# Altium PCB Template2.PcbDoc (part 2 of 2)
Units mm, origin at the board's own origin, x right, y up, seen from the top; angles counter-clockwise.
Board outline 69.9 x 70 mm, 4 copper layers (Top Layer, InternalPlane1, InternalPlane2, Bottom Layer), stack 1.963 mm thick; 136 components, 102 nets, 457 pads, 402 vias.
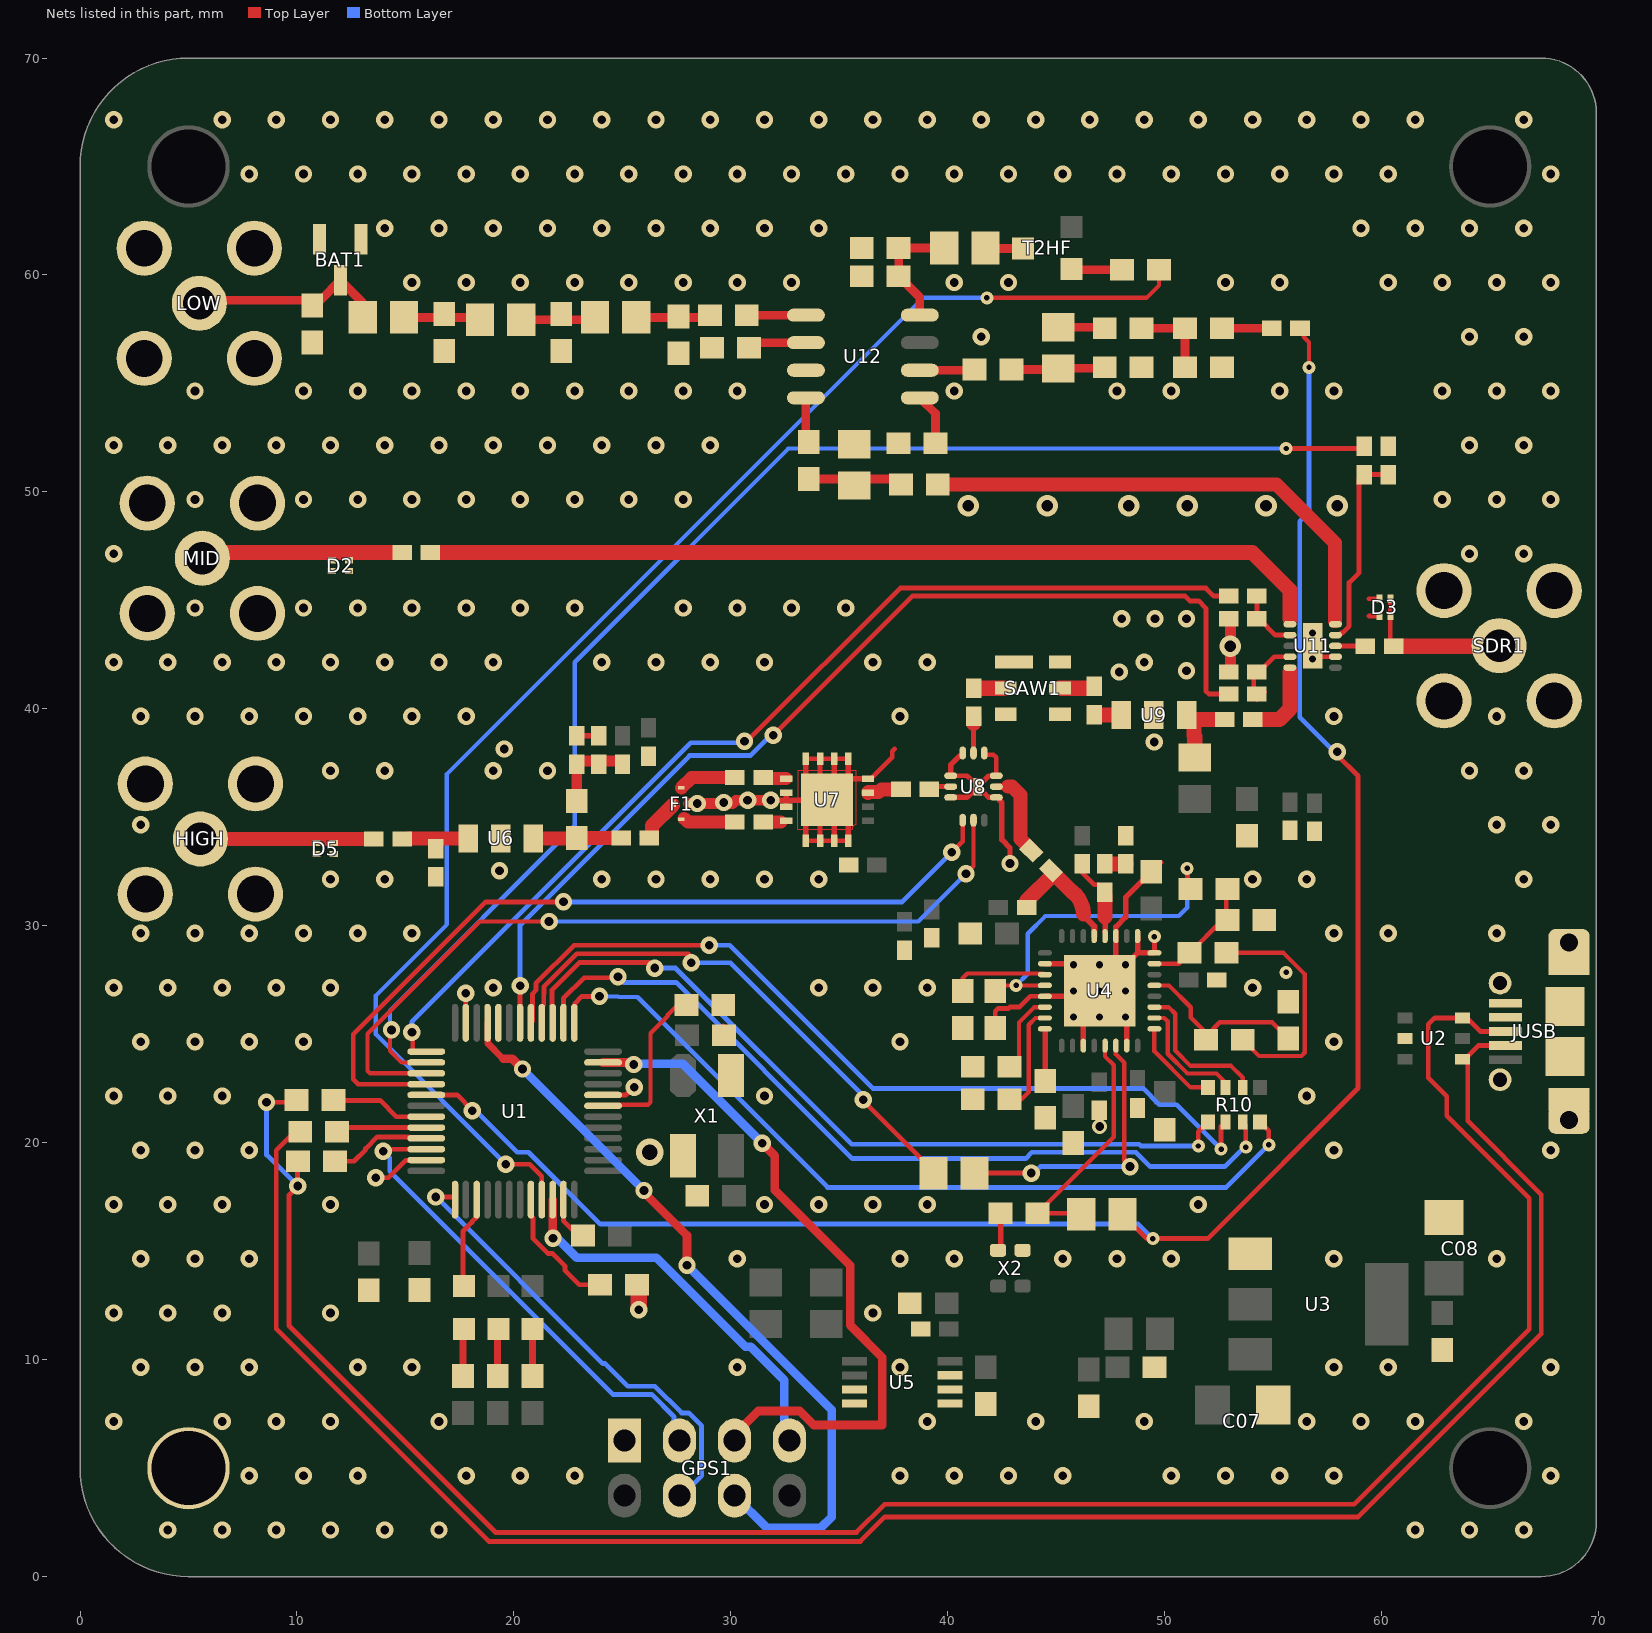
[diagram p4: the nets of this part, all layers, seen from the top]

## Via types
v1: diameter 0.8, hole 0.4, Top Layer to Bottom Layer, 348 vias
v2: diameter 0.6, hole 0.25, Top Layer to Bottom Layer, 22 vias
v3: diameter 1.27, hole 0.711, Top Layer to Bottom Layer, 13 vias
v4: diameter 0.66, hole 0.33, Top Layer to Bottom Layer, tented top, 11 vias
v5: diameter 1, hole 0.54, Top Layer to Bottom Layer, 7 vias
v6: diameter 0.7, hole 0.4, Top Layer to Bottom Layer, 1 vias

## Nets (pads, with @x,y where several pads share a name; then routed paths per layer and width w, separated by ;. In a path a pad name is that pad's centre, name@x,y a point inside that pad or via, vN(x,y) a via of type N, cw(c..) or ccw(c..) an arc to the next point about the centre after c; other vN are vias at no path point) (continued)
CPU_TX: GPS1.6 U1.21 | length 35.5
  Top Layer w0.3: U1.21@18.786,25.525 18.786,24.593 19.504,23.875
  Top Layer w0.4: 19.504,23.875 19.925,23.875 v1(20.4,23.4) ; v1(26,17.8) 26,17.7 27.98,15.72 v1(27.98,14.35) ; GPS1.6@30.17,3.73 GPS1.6@30.17,4.288
  Bottom Layer w0.4: v1(20.4,23.4) v1(26,17.8) ; v1(27.98,14.35) 34.65,7.68 34.65,2.75 34.15,2.25 31.65,2.25 GPS1.6@30.17,3.73
CPU_USB_LED: U1.39 USB.2 | length 3.9
  Top Layer w0.22: USB.2@17.654,13.687 17.654,15.915 18.066,16.327 18.066,16.348 18.271,16.553 18.271,17.36 U1.39@18.286,17.375
CS_PLL: R10.5 U1.14 | length 38.5
  Top Layer w0.22: U1.14@22.286,25.525 22.286,26.65 23.236,27.6 24.65,27.6 v1@24.8,27.75 ; R10.5@53.6,20.95 53.736,20.814 v2(53.736,19.8)
  Bottom Layer w0.22: v1(24.8,27.65) 25.06,27.39 27.48,27.39 35.6,19.27 43.587,19.27 43.877,19.56 48.673,19.56 49.333,18.9 52.764,18.9 53.664,19.8 v2(53.736,19.8)
CS_U1: R10.6 U4.3 | length 6.9
  Top Layer w0.2: U4.3@49.525,26.25 50.178,26.25 50.486,25.942 50.486,24.247 51.191,23.542 53.058,23.542 53.6,23 R10.6@53.6,22.55
GND: BAT1.1 BAT1.2 C01.1 C02.1 C03.1 C04.1 C05.1 C06.1 C07.2 C08.2 C09.1 C10.1 C11.1 C12.1 C13.1 C14.1 C15.1 C16.1 C17.1 C18.1 C19.1 C20.1 C21.1 C22.1 C23.1 C25.1 C28.1 C29.1 C32.1 C33.2 C34.1 C38.1 C39.1 C40.1 C41.1 C45.2 C46.2 C47.1 C54.1 C55.1 C56.1 C57.1 C58.1 C59.1 C60.1 C62.2 C64.1 D2.1 D2.2 D3.1 D3.2 D5.1 D5.2 F1.4 GPS1.1 H2.0 HIGH.2 HIGH.3 HIGH.4 HIGH.5 JUSB.4 JUSB.5 JUSB.6 L9.1 LOW.2 LOW.3 LOW.4 LOW.5 MID.2 MID.3 MID.4 MID.5 R01.1 R08.1 R14.1 R17.1 R24.1 R26.1 R27.2 R28.2 SAW1.1 SAW1.3 SAW1.4 SAW1.6 SDR1.2 SDR1.3 SDR1.4 SDR1.5 U1.8 U1.20 U1.23 U1.35 U1.47 U2.2 U3.1 U4.8 U4.9 U4.11 U4.18 U4.21 U4.27 U4.31 U4.33 U5.3 U5.4 U5.5 U5.6 U5.7 U6.2 U7.4 U7.5 U7.6 U7.7 U7.8 U7.10 U7.11 U7.13 U7.14 U7.15 U7.16 U7.17 U8.1 U8.3 U8.4 U8.6 U8.10 U8.12 U8.13 U9.2 U11.7 U11.11 U12.3 X1.2 X1.4 X2.2 | length 84.1
  Top Layer w0.22: v1(13.639,18.39) 14.219,18.39 15.014,19.185 15.946,19.185 U1.35@15.961,19.2 ; U1.23@17.786,25.525 v1(17.786,26.886) ; U1.47@22.286,17.375 22.286,16.409 22.975,15.72 C02.1@23.183,15.72 ; U1.8@24.111,22.2 25.15,22.203 v1(25.55,22.55) ; C05.1@29.65,25.39 30.04,25 30.08,25 C05.1@29.861,25.219 ; C06.1@29.861,26.139 C06.1@29.65,26.35 29.69,26.35 C06.1@30.08,25.96 ; v1(31.836,35.783) v1@32.192,35.783 ; U7.13@33.461,33.919 U7.13@33.461,33.919 U7.14@34.111,33.919 34.761,33.92 U7.15@34.762,33.921 ; U7.8@33.461,37.696 33.462,37.695 34.111,37.695 34.761,37.695 35.41,37.695 U7.5@35.411,37.694 ; U7.15@34.762,33.921 U7.16@35.41,33.921 ; U7.4@36.323,36.783 36.46,36.783 37.439,37.762 37.439,38.039 37.55,38.15 ; U8.4@40.136,36.915 40.886,36.915 41.096,36.705 41.296,36.705 41.386,36.615 U8.13@41.386,36.415 41.386,36.215 41.476,36.125 41.676,36.125 41.871,35.93 U8.10@41.963,35.93 ; U8.1@41.686,37.965 41.686,37.925 41.723,37.888 42.107,37.888 42.236,37.759 U8.12@42.236,36.915 ; C25.1@42.186,25.292 42.186,26.053 42.315,26.182 42.794,26.182 42.87,26.258 43.32,26.258 43.811,26.75 U4.21@44.475,26.75 ; U8.10@42.226,35.924 U8.10@42.236,35.915 ; C19.1@46.986,21.492 46.986,20.784 ccw(c47.034,20.784) v6(47,20.75) ; U4.9@48.75,29.525 U4.9@48.763,29.513 ; v2@49.513,29.513 v2(49.525,29.5) U4.8@49.525,28.75 ; C54.1@52.95,41.7 C54.1@53.025,41.775 ; C55.1@52.95,44.15 C55.1@53.025,44.075 ; U11.11@56.819,42.9 56.819,42.74 57.159,42.4 U11.7@57.869,42.4 ; 59.4,44.279 D3.2@59.9,44.279 ; 59.4,45.079 D3.1@59.9,45.079 ; JUSB.6@68.638,29.218 68.36,29.218 JUSB.6@68.708,29.566
  Top Layer w0.25: C33.2@22.9,38.75 C34.1@23.909,38.75 ; v1@32.192,35.783 32.549,35.783 ; U7.11@32.549,35.481 32.549,35.783 ; U7.10@32.549,36.133 32.549,35.783 ; U7.13@33.461,33.919 33.461,34.458 33.461,34.833 U7.17@34.111,35.483 ; U7.8@33.461,37.696 33.461,37.158 33.461,36.783 U7.17@34.111,36.133 ; U7.14@34.111,33.919 34.111,34.458 U7.17@34.111,35.483 ; U7.7@34.111,37.695 34.111,37.158 U7.17@34.111,36.133 ; U7.6@34.761,37.695 34.761,37.158 U7.17@34.761,36.133 ; U7.15@34.762,33.921 34.762,34.458 U7.17@34.762,35.482 ; U7.16@35.411,33.92 35.411,34.458 35.411,34.833 U7.17@34.762,35.482 ; U7.5@35.411,37.694 35.411,37.158 U7.17@35.411,36.783 ; U7.4@36.323,36.783 35.786,36.783 U7.17@35.411,36.783 ; U8.6@40.136,35.915 40.886,35.915 U8.13@41.324,36.352 ; U8.4@40.136,36.915 40.136,37.415 40.526,37.805 40.663,37.805 40.686,37.828 U8.3@40.686,37.965 ; U8.13@41.386,36.615 41.461,36.69 41.661,36.69 41.876,36.905 42.226,36.905 U8.12@42.236,36.915 ; 41.876,35.924 42.226,35.924 42.363,35.924 42.396,35.892 42.396,35.784 42.436,35.743 42.436,35.73 42.491,35.675 42.491,33.968 42.87,33.589 v1(42.87,32.87) ; U4.21@44.475,26.75 U4.33@46.75,26.75 ; U4.18@44.475,28.25 45.75,28.25 v4(45.8,28.2) v4(47,27) ; U4.27@46.25,24.475 46.25,26.25 U4.33@46.75,26.75 ; U4.31@48.25,24.475 48.25,25.75 v4(48.2,25.8) v4(47,27) ; U4.9@48.75,29.525 48.75,28.75 ; U4.8@49.525,28.75 48.75,28.75 ; C15.1@49.811,32.917 49.761,32.917 49.386,32.542 C15.1@49.386,32.492 49.386,32.442 49.011,32.067 48.961,32.067 48.2,31.306 48.2,30.4 47.75,29.95 U4.11@47.75,29.525 U4.33@47.75,27.75 ; 32.549,35.783 33.086,35.783 U7.17@34.411,35.783 ; U7.17@34.111,35.483 U7.17@34.411,35.783 ; U7.17@34.111,36.133 U7.17@34.436,35.808 ; U7.17@34.411,35.783 U7.17@34.436,35.808 ; U7.17@34.436,35.808 U7.17@34.761,36.133 ; U7.17@34.436,35.808 U7.17@34.762,35.482 ; U7.17@34.761,36.133 U7.17@35.411,36.783 ; U4.33@46.75,26.75 v4(47,27) ; v4(47,27) U4.33@47.75,27.75 ; U4.33@47.75,27.75 48.75,28.75
  Top Layer w0.5: F1.4@28.047,35.633 29.623,35.633 v1(29.668,35.679) ; v1@29.668,35.633 30.074,35.633 30.224,35.783 31.697,35.783 v1@31.738,35.742 ; C54.1@53.025,41.775 v5(53.025,42.885) C55.1@53.025,44.075
  Top Layer w0.75: v1(25.75,12.3) R01.1@25.75,13.4
  other v1: 4.05,2.15 6.55,2.15 9.05,2.15 11.55,2.15 14.05,2.15 16.55,2.15 61.55,2.15 64.05,2.15 66.55,2.15 7.8,4.65 10.3,4.65 12.8,4.65 17.8,4.65 20.3,4.65 22.8,4.65 37.8,4.65 40.3,4.65 42.8,4.65 45.3,4.65 50.3,4.65 52.8,4.65 55.3,4.65 57.8,4.65 67.8,4.65 1.55,7.15 6.55,7.15 9.05,7.15 11.55,7.15 16.55,7.15 39.05,7.15 44.05,7.15 49.05,7.15 56.55,7.15 59.05,7.15 61.55,7.15 66.55,7.15 2.8,9.65 5.3,9.65 7.8,9.65 12.8,9.65 15.3,9.65 30.3,9.65 37.8,9.65 57.8,9.65 60.3,9.65 67.8,9.65 1.55,12.15 4.05,12.15 6.55,12.15 11.55,12.15 36.55,12.15 2.8,14.65 5.3,14.65 7.8,14.65 30.3,14.65 37.8,14.65 40.3,14.65 45.3,14.65 47.8,14.65 50.3,14.65 57.8,14.65 65.3,14.65 1.55,17.15 4.05,17.15 6.55,17.15 11.55,17.15 31.55,17.15 34.05,17.15 36.55,17.15 39.05,17.15 51.55,17.15 2.8,19.65 5.3,19.65 7.8,19.65 57.8,19.65 67.8,19.65 1.55,22.15 4.05,22.15 6.55,22.15 31.55,22.15 56.55,22.15 2.8,24.65 5.3,24.65 7.8,24.65 10.3,24.65 37.8,24.65 57.8,24.65 1.55,27.15 4.05,27.15 6.55,27.15 9.05,27.15 11.55,27.15 19.05,27.15 34.05,27.15 36.55,27.15 39.05,27.15 54.05,27.15 2.8,29.65 5.3,29.65 7.8,29.65 10.3,29.65 12.8,29.65 15.3,29.65 57.8,29.65 60.3,29.65 65.3,29.65 11.55,32.15 14.05,32.15 24.05,32.15 26.55,32.15 29.05,32.15 31.55,32.15 34.05,32.15 54.05,32.15 56.55,32.15 66.55,32.15 19.337,32.539 2.8,34.65 65.3,34.65 67.8,34.65 28.45,35.633 30.772,35.783 11.55,37.15 14.05,37.15 19.05,37.15 21.55,37.15 64.05,37.15 66.55,37.15 19.55,38.15 49.516,38.47 2.8,39.65 5.3,39.65 7.8,39.65 10.3,39.65 12.8,39.65 15.3,39.65 17.8,39.65 37.8,39.65 57.8,39.65 65.3,39.65 47.905,41.7 51.005,41.75 1.55,42.15 4.05,42.15 6.55,42.15 9.05,42.15 11.55,42.15 14.05,42.15 16.55,42.15 19.05,42.15 24.05,42.15 26.55,42.15 29.05,42.15 31.55,42.15 36.55,42.15 39.05,42.15 49.05,42.15 48.019,44.15 49.55,44.15 51.005,44.15 5.3,44.65 10.3,44.65 12.8,44.65 15.3,44.65 17.8,44.65 20.3,44.65 22.8,44.65 27.8,44.65 30.3,44.65 32.8,44.65 35.3,44.65 1.55,47.15 64.05,47.15 66.55,47.15 5.3,49.65 10.3,49.65 12.8,49.65 15.3,49.65 17.8,49.65 20.3,49.65 22.8,49.65 25.3,49.65 27.8,49.65 62.8,49.65 65.3,49.65 67.8,49.65 1.55,52.15 4.05,52.15 6.55,52.15 9.05,52.15 11.55,52.15 14.05,52.15 16.55,52.15 19.05,52.15 21.55,52.15 24.05,52.15 26.55,52.15 29.05,52.15 64.05,52.15 66.55,52.15 5.3,54.65 10.3,54.65 12.8,54.65 15.3,54.65 17.8,54.65 20.3,54.65 22.8,54.65 25.3,54.65 27.8,54.65 30.3,54.65 40.3,54.65 47.8,54.65 50.3,54.65 55.3,54.65 57.8,54.65 62.8,54.65 65.3,54.65 67.8,54.65 41.55,57.15 64.05,57.15 66.55,57.15 15.3,59.65 17.8,59.65 20.3,59.65 22.8,59.65 25.3,59.65 27.8,59.65 30.3,59.65 32.8,59.65 40.3,59.65 42.8,59.65 52.8,59.65 55.3,59.65 60.3,59.65 62.8,59.65 65.3,59.65 67.8,59.65 14.05,62.15 16.55,62.15 19.05,62.15 21.55,62.15 24.05,62.15 26.55,62.15 29.05,62.15 31.55,62.15 34.05,62.15 59.05,62.15 61.55,62.15 64.05,62.15 66.55,62.15 7.8,64.65 10.3,64.65 12.8,64.65 15.3,64.65 17.8,64.65 20.3,64.65 22.8,64.65 25.3,64.65 27.8,64.65 30.3,64.65 32.8,64.65 35.3,64.65 37.8,64.65 40.3,64.65 42.8,64.65 45.3,64.65 47.8,64.65 50.3,64.65 52.8,64.65 55.3,64.65 57.8,64.65 60.3,64.65 67.8,64.65 1.55,67.15 6.55,67.15 9.05,67.15 11.55,67.15 14.05,67.15 16.55,67.15 19.05,67.15 21.55,67.15 24.05,67.15 26.55,67.15 29.05,67.15 31.55,67.15 34.05,67.15 36.55,67.15 39.05,67.15 41.55,67.15 44.05,67.15 46.55,67.15 49.05,67.15 51.55,67.15 54.05,67.15 56.55,67.15 59.05,67.15 61.55,67.15 66.55,67.15
  other v2: 55.6,27.85
  other v3: 26.254,19.554
  other v4: 45.8,25.8 47,25.8 45.8,27 48.2,27 47,28.2 48.2,28.2 56.819,42.3 56.819,43.5
  other v5: 40.95,49.364 44.583,49.364 48.345,49.364 51.036,49.364 54.669,49.364 57.955,49.364
GPS_RST: GPS1.7 U1.46 | length 18.3
  Top Layer w0.4: U1.46@21.786,17.375 21.786,15.9 22,15.686 21.914,15.6 v1(21.8,15.6)
  Bottom Layer w0.4: v1(21.8,15.6) 22,15.6 22.9,14.7 26.569,14.7 30.678,10.591 30.916,10.591 32.458,9.05 32.458,6.776 32.71,6.524 GPS1.7@32.71,6.27
IMG_F_HIGH: C36.1 F1.3 | length 2.4
  Top Layer w0.6: F1.3@27.85,34.95 28.017,34.783 C36.1@30.186,34.783
IMG_F_LOW: C37.1 F1.1 | length 2.7
  Top Layer w0.6: F1.1@27.722,36.358 28.191,36.828 C37.1@30.186,36.828
LO+: C26.2 U8.11 | length 4
  Top Layer w0.3: U8.11@42.236,36.415 42.786,36.415
  Top Layer w0.65: 42.786,36.415 42.969,36.415 43.35,36.034 43.35,33.992 43.84,33.502 C26.2@43.84,33.467
LO-: C27.2 R14.2 | length 1
  Top Layer w0.7: C27.2@47.236,32.85 R14.2@48.2,32.85
MCO: C67.2 R11.2 U1.29 | length 86.9
  Top Layer w0.2: 56.436,57.186 56.4,57.15 56.65,56.9 v2(56.65,55.742)
  Top Layer w0.22: U1.29@15.961,22.2 17.379,22.2 18.083,21.496 v1(18.083,21.473) ; R11.2@48.05,16.7 49.171,15.579 v2(49.45,15.579) 51.979,15.579 58.91,22.51 58.91,36.908 57.955,37.863 v1(57.955,38.015)
  Bottom Layer w0.22: v1@17.9,21.29 v1(18.083,21.473) 18.24,21.473 20.152,19.56 20.673,19.56 23.983,16.25 48.779,16.25 v2(49.45,15.579) ; v2(56.65,55.742) 56.65,49.058 56.229,48.637 56.229,39.61 57.824,38.015 v1(57.955,38.015)
MIX_EN: U1.28 U8.7 | length 38.3
  Top Layer w0.22: U1.28@15.961,22.7 12.819,22.7 12.6,22.919 12.6,25 18.7,31.1 v1(22.286,31.1) ; v1(40.186,33.386) 40.686,33.886 U8.7@40.686,34.865
  Bottom Layer w0.22: v1(22.286,31.1) 37.9,31.1 v1(40.186,33.386)
MIX_X2: U1.27 U8.8 | length 37.7
  Top Layer w0.2: U1.27@15.961,23.2 13.367,23.2 13.25,23.317 13.25,25.019 18.431,30.2 v1(21.622,30.2) ; v1(40.843,32.399) 41.186,32.742 U8.8@41.186,34.865
  Bottom Layer w0.2: v1(21.622,30.2) 38.644,30.2 v1(40.843,32.399)
Mixer_switch_in: C44.2 U11.5 | length 3.6
  Top Layer w0.7: C44.2@54.058,39.514 55.294,39.514 55.769,39.989 55.769,41.7
MOSI: R10.3 U1.17 | length 39.4
  Top Layer w0.22: U1.17@20.786,25.525 20.86,25.599 20.86,26.87 21.016,27.027 21.016,27.344 22.772,29.1 v1@28.986,29.1 ; v2(52.6,19.7) 52.6,20.75 R10.3@52.8,20.95
  Bottom Layer w0.22: v1(29,29.1) 29.95,29.1 36.55,22.5 49.008,22.5 49.754,21.754 50.546,21.754 v2(52.6,19.7)
MOSI_U1: R10.4 U4.2 | length 5.6
  Top Layer w0.2: U4.2@49.525,25.75 49.978,25.75 50.136,25.592 50.136,24.102 51.046,23.192 52.387,23.192 52.8,22.779 R10.4@52.8,22.55
MUXOUT_U1: R09.2 U4.30 | length 13.3
  Top Layer w0.2: U4.30@47.75,24.475 47.75,24.078 48.136,23.692 48.136,19.164 v1(48.4,18.9) v1@48.5,18.8
  Top Layer w0.22: R09.2@41.236,18.6 43.394,18.6 v1(43.85,18.6)
  Bottom Layer w0.22: v1(43.85,18.6) 43.969,18.6 44.269,18.9 v1(48.4,18.9)
NetC06_2: C06.2 U1.7 | length 7.2
  Top Layer w0.2: U1.7@24.111,21.7 24.863,21.7 24.913,21.75 26.183,21.75 26.3,21.867 26.3,25.05 27.1,25.85 27.1,25.9 27.5,26.3 C06.2@27.55,26.3
NetC20_2: C20.2 U4.23 | length 5
  Top Layer w0.2: C20.2@42.85,22 43.394,22 43.736,22.342 43.736,25.442 44.044,25.75 U4.23@44.475,25.75
NetC21_2: C21.2 U4.19 | length 4.5
  Top Layer w0.2: C21.2@40.686,26.992 40.686,27.592 40.894,27.8 44.425,27.8 U4.19@44.475,27.75
NetC22_2: C22.2 U4.24 | length 2.4
  Top Layer w0.25: U4.24@44.475,25.25 44.5,25.225 C22.2@44.5,22.85
NetC23_2: C23.2 C24.2 R15.1 U4.7 | length 5.7
  Top Layer w0.2: U4.7@49.525,28.25 50.65,28.25 C24.2@51.15,28.75 52.65,30.25 52.85,30.25 52.836,30.264 R15.1@52.836,31.742
NetC24_1: C24.1 R16.2 | length 10.9
  Top Layer w0.2: C24.1@52.85,28.75 55.478,28.75 56.45,27.778 56.45,24.146 56.304,24 54.35,24 R16.2@53.6,24.75
NetC31_1: C31.1 C32.2 U6.1 | length 2.8
  Top Layer w0.635: C31.1@15.122,34 15.147,34.025 U6.1@17.9,34.025
NetC31_2: C31.2 D5.3 D5.4 HIGH.1 | length 7.8
  Top Layer w0.635: HIGH.1@5.55,34 C31.2@13.35,34
NetC33_1: C33.1 C34.2 L2.2 R20.2 | length 4
  Top Layer w0.22: C33.1@22.9,37.59 C33.1@22.9,37.65
  Top Layer w0.5: L2.2@22.9,35.75 C33.1@22.9,37.45 22.9,37.59 R20.2@25,37.59
NetC35_1: C35.1 L2.1 U6.3 | length 4.1
  Top Layer w0.22: L2.1@22.875,34.025 L2.1@22.9,34.05
  Top Layer w0.635: U6.3@20.9,34.025 L2.1@22.875,34.025 ; L2.1@22.9,34.05 C35.1@24.95,34.05
NetC35_2: C35.2 F1.2 | length 3.3
  Top Layer w0.22: F1.2@27.322,35.558 27.327,35.558 27.397,35.628 F1.2@27.397,35.633 ; C35.2@25.91,34.236 C35.2@26.25,34.05 26.449,34.249 26.407,34.236 C35.2@25.91,34.236
  Top Layer w0.65: C35.2@26.25,34.05 26.35,34.05 26.375,34.075 26.375,34.611 F1.2@27.322,35.558
NetC42_1: C42.1 U8.2 | length 1.7
  Top Layer w0.25: U8.2@41.186,37.965 C42.1@41.186,39.331
  Top Layer w0.7: C42.1@41.186,39.331 41.2,39.345 C42.1@41.2,39.65
NetC42_2: C42.2 SAW1.2 | length 1.5
  Top Layer w0.7: C42.2@41.2,40.95 SAW1.2@42.676,40.95
NetC43_1: C43.1 SAW1.5 | length 1.6
  Top Layer w0.22: C43.1@46.669,40.95 C43.1@46.752,41.033
  Top Layer w0.7: SAW1.5@45.176,40.95 C43.1@46.669,40.95
NetC43_2: C43.2 U9.1 | length 1.4
  Top Layer w0.22: C43.2@46.752,39.733 C43.2@46.771,39.714
  Top Layer w0.635: U9.1@47.923,39.632 U9.1@48.005,39.714
  Top Layer w0.7: C43.2@46.771,39.714 U9.1@48.005,39.714
NetC44_1: C44.1 L3.1 U9.3 | length 4.1
  Top Layer w0.22: U9.3@51.005,39.714 51.205,39.514 U9.3@51.345,39.374 ; 51.345,38.767 51.382,38.73
  Top Layer w0.635: U9.3@51.005,39.514 U9.3@51.005,39.682 ; U9.3@51.005,39.714 U9.3@51.005,39.682 ; U9.3@51.138,39.55 U9.3@51.005,39.682
  Top Layer w0.7: U9.3@51.205,39.514 C44.1@52.758,39.514 ; 51.345,38.767 U9.3@51.345,39.374 ; L3.1@51.382,37.75 51.382,38.73
NetC51_1: C51.1 D2.3 D2.4 MID.1 | length 9.3
  Top Layer w0.7: MID.1@5.65,47.05 5.8,47.2 C51.1@14.897,47.2
NetC51_2: C51.2 U11.1 | length 41.6
  Top Layer w0.7: C51.2@16.25,47.2 54.036,47.2 55.769,45.467 55.769,44.15
NetC53_1: C53.1 U11.8 | length 1.5
  Top Layer w0.22: U11.8@57.869,42.9 59.1,42.9 C53.1@59.3,42.7
NetC53_2: C53.2 D3.3 D3.4 SDR1.1 | length 7.3
  Top Layer w0.22: D3.4@60.4,45.079 D3.3@60.4,44.279 60.4,43.035 C53.2@60.55,42.885
  Top Layer w0.7: C53.2@60.55,42.885 SDR1.1@64.985,42.885 ; SDR1.1@64.99,42.895 SDR1.1@65.415,42.47
NetC54_2: C54.2 R21.2 U11.4 | length 3.4
  Top Layer w0.22: R21.2@54.25,40.688 54.108,40.83 54.108,41.558 C54.2@54.25,41.7 54.35,41.7 55.05,42.4 U11.4@55.769,42.4 ; R21.2@54.253,40.431 R21.2@54.603,40.781
NetC55_2: C55.2 R22.2 U11.2 | length 2.9
  Top Layer w0.22: R22.2@54.25,45.2 C55.2@54.25,44.15 54.35,44.15 55.1,43.4 U11.2@55.769,43.4
NetC56_2: C56.2 R23.2 U11.9 | length 9
  Top Layer w0.22: U11.9@57.869,43.4 58.041,43.4 58.131,43.49 58.189,43.49 58.5,43.801 58.5,45.821 58.96,46.281 58.96,50.56 R23.2@59.2,50.8 ; R23.2@59.355,50.8 C56.2@60.3,50.8
NetC57_2: C57.2 C58.2 L5.1 U12.8 | length 5.6
  Top Layer w0.4: U12.8@38.711,58.147 38.711,58.967 C57.2@37.736,59.942 C58.2@37.736,61.242 L5.1@39.836,61.242
NetC59_2: C59.2 L6.1 L7.2 | length 3.5
  Top Layer w0.4: L6.1@14.936,58.042 18.336,58.042 L7.2@18.436,57.942
NetC60_2: C60.2 L7.1 L8.2 | length 3.4
  Top Layer w0.4: L7.1@20.336,57.942 23.636,57.942 L8.2@23.736,58.042
NetC61_2: C61.2 L8.1 R26.2 | length 3.4
  Top Layer w0.4: L8.1@25.636,58.042 28.936,58.042 C61.2@29.036,58.142
NetC65_2: C65.2 C66.1 L9.2 | length 4.4
  Top Layer w0.4: C65.2@33.586,50.592 37.586,50.592 C66.1@37.836,50.342
NetC67_1: C67.1 R36HF.2 | length 2.1
  Top Layer w0.4: R36HF.2@52.636,57.542 C67.1@54.736,57.542
NetC68_1: C68.1 L10.2 | length 2.2
  Top Layer w0.4: L10.2@45.086,57.592 47.186,57.592 C68.1@47.236,57.542
NetC68_2: C68.2 R27.1 R36HF.1 | length 3.8
  Top Layer w0.4: C68.2@48.936,57.542 R36HF.1@50.936,57.542 R27.1@50.936,55.742
NetC70_1: C70.1 U7.3 | length 1.6
  Top Layer w0.65: U7.3@36.323,36.133 36.349,36.158 36.807,36.158 36.939,36.29 C70.1@37.844,36.29
NetC70_2: C70.2 U8.5 | length 0.6
  Top Layer w0.22: C70.2@39.517,36.415 U8.5@40.136,36.415
NetL5_2: L5.2 T2HF.3 | length 1.7
  Top Layer w0.4: L5.2@41.736,61.242 41.761,61.217 T2HF.3@43.468,61.217
NetLOCK_1: LOCK.1 R03.1 | length 1.9
  Top Layer w0.32: R03.1@19.254,9.246 LOCK.1@19.254,11.105
NetMIX_1: MIX.1 R04.1 | length 1.9
  Top Layer w0.32: R04.1@20.854,9.246 MIX.1@20.854,11.105
NetR01_2: R01.2 U1.44 | length 6
  Top Layer w0.22: U1.44@20.786,17.375 20.786,16.628 20.876,16.538 20.876,15.591 21.568,14.899 21.776,14.899 22.362,14.313 22.362,14.105 23.017,13.45 23.55,13.45 23.9,13.8 R01.2@23.95,13.8
NetR02_1: R02.1 USB.1 | length 1.9
  Top Layer w0.32: R02.1@17.654,9.246 USB.1@17.654,11.105
NetR08_2: R08.2 U4.22 | length 3.7
  Top Layer w0.2: R08.2@42.85,23.5 43.286,23.936 43.286,25.542 43.994,26.25 U4.22@44.475,26.25
NetR10_2: R10.2 U4.1 | length 4.2
  Top Layer w0.2: U4.1@49.525,25.25 49.525,24.218 51.193,22.55 R10.2@52,22.55
PLL_EN: R10.7 U1.13 | length 38.8
  Top Layer w0.22: U1.13@22.786,25.525 22.801,25.54 22.801,26.415 23.132,26.746 v1(23.946,26.746) ; R10.7@54.4,20.95 54.8,20.55 v2(54.8,19.9)
  Bottom Layer w0.22: v1(23.946,26.746) 23.879,26.75 23.946,26.748 25.7,26.7 34.46,17.94 52.84,17.94 v2(54.8,19.9)
PLL_MISO: R09.1 U1.16 | length 24.9
  Top Layer w0.22: U1.16@21.286,25.525 21.286,26.272 21.376,26.362 21.376,26.863 21.386,26.873 21.386,27.191 22.905,28.71 28.04,28.71 v1@28.4,28.35 ; v1@36.175,22.125 36.175,21.861 39.336,18.7 R09.1@39.336,18.6
  Bottom Layer w0.22: v1(28.175,28.3) 29.979,28.3 36.154,22.125 v1@36.175,22.125
  other v1: 36.1,21.987
PPS_IN: GPS1.5 U1.11 | length 32
  Top Layer w0.4: U1.11@24.111,23.7 25.313,23.7 25.41,23.603 v1(25.518,23.603) ; GPS1.5@30.17,6.27 30.17,6.54 31.266,7.636 33.171,7.636 33.822,6.985 36.984,6.984 36.984,10.103 35.5,11.587 35.5,14.345 34.7,15.145 32.8,17.05 32.029,17.821 32.029,19.4 v1(31.45,19.979)
  Bottom Layer w0.4: v1(25.518,23.603) 25.557,23.642 27.787,23.642 v1(31.45,19.979)
REF_PLL: C30.2 R11.1 U4.29 | length 11.4
  Top Layer w0.2: C30.2@44.136,16.75 C30.2@44.186,16.75 ; R11.1@46.15,16.7 46.1,16.75 C30.2@44.186,16.75 ; U4.29@47.25,24.475 47.25,23.978 47.65,23.578 47.65,20.264 44.586,17.2 44.586,17.15 C30.2@44.186,16.75
RFOUTA+: C26.1 R12.1 U4.13 | length 5.7
  Top Layer w0.2: R12.1@43.636,30.842 R12.1@43.636,31.142
  Top Layer w0.3: 46.25,30.55 46.25,30.481 46.75,29.981 U4.13@46.75,29.525
  Top Layer w0.7: R12.1@43.636,31.142 44.893,32.399 45.74,31.552 cw(c45.743,31.468) 45.786,31.54 45.907,31.419 cw(c44.843,30.497) 46.25,30.55
RFOUTA-: C27.1 R13.1 U4.12 | length 3.7
  Top Layer w0.2: R13.1@46.2,32.85 46.2,32.442 46.752,31.89 46.986,31.89 47.25,31.626 C27.1@47.25,31.392
  Top Layer w0.25: U4.12@47.25,29.725 47.25,30.4
  Top Layer w0.7: 47.25,30.4 C27.1@47.25,31.392
SCK: R10.1 U1.15 | length 36.6
  Top Layer w0.22: 21.756,26.72 21.756,26.337 21.771,26.322 21.771,25.54 U1.15@21.786,25.525 ; 21.756,26.72 21.756,27.038 23.028,28.31 26.24,28.31 v1(26.5,28.05) ; v2(51.55,19.85) 51.55,20.5 R10.1@52,20.95
  Bottom Layer w0.22: v1(26.5,28.05) 27.45,28.05 35.57,19.93 48.827,19.93 48.907,19.85 v2(51.55,19.85)
SMA_SW: BAT1.3 L6.2 LOW.1 R24.2 | length 9
  Top Layer w0.4: LOW.1@5.5,58.836 11.086,58.836 BAT1.3@12,59.75 13.036,58.714 L6.2@13.036,58.042
SW_BYPASS: R22.1 U1.25 | length 48.1
  Top Layer w0.22: v1(15.3,25.089) 15.334,25.055 15.334,24.237 15.371,24.2 U1.25@15.961,24.2 ; v1(30.628,38.505) 30.741,38.505 37.806,45.569 51.9,45.569 52.269,45.2 R22.1@52.95,45.2
  Bottom Layer w0.22: v1(15.3,25.089) 15.3,25.571 28.162,38.433 30.555,38.433 v1(30.628,38.505)
SW_MIX: R21.1 U1.18 | length 47.6
  Top Layer w0.22: U1.18@20.286,25.525 v1(20.286,27.23) ; v1(31.951,38.781) 38.369,45.199 50.936,45.199 51.162,44.973 51.564,44.973 51.9,44.637 51.9,40.817 52.029,40.688 R21.1@52.95,40.688
  Bottom Layer w0.22: v1(20.286,27.23) 20.286,30.033 28.098,37.845 30.901,37.845 31.837,38.781 v1(31.951,38.781)
SW_MIX_CPU: R23.1 U1.26 | length 64
  Top Layer w0.2: v1(14.356,25.199) 14.289,25.131 14.289,24.237 14.825,23.7 U1.26@15.961,23.7
  Top Layer w0.22: v2(55.6,52) R23.1@59.1,52 ; R23.1@58.95,52.1 R23.1@59.2,52.1
  Bottom Layer w0.2: v1(14.356,25.199) 14.289,25.267 14.289,26.098 22.801,34.61 22.801,42.149 32.652,52 v2(55.6,52)
SW_U1: R16.1 R17.2 U4.5 | length 8.3
  Top Layer w0.2: U4.5@49.525,27.25 50.196,27.25 51.204,26.242 51.204,25.77 51.382,25.592 51.386,25.592 51.9,25.078 R16.1@51.9,24.914 ; R16.1@51.9,24.75 R16.1@51.9,24.914 ; R17.2@55.7,24.8 54.95,25.55 52.536,25.55 R16.1@51.9,24.914
SWCLK: GPS1.4 U1.37 | length 21.3
  Top Layer w0.22: v1(16.4,17.5) 17.249,17.5 17.286,17.463 U1.37@17.286,17.375
  Bottom Layer w0.22: v1(16.4,17.5) 16.419,17.5 24.099,9.82 24.203,9.82 25.253,8.77 26.503,8.77 27.727,7.546 28.053,7.546 28.652,6.947 28.652,5.267 28.659,5.26 28.659,4.659 28.359,4.359 ; GPS1.4@27.63,3.73 27.729,3.73 28.358,4.359
SWDIO: GPS1.3 U1.34 | length 22.1
  Top Layer w0.22: v1(13.972,19.606) 14.066,19.7 U1.34@15.961,19.7
  Bottom Layer w0.22: v1(13.972,19.606) 14.278,19.299 14.278,18.688 24.567,8.4 26.35,8.4 27.38,7.37 27.38,6.52 GPS1.3@27.63,6.27
T2_BASE: R25.2 T2HF.1 | length 2.3
  Top Layer w0.4: T2HF.1@45.704,60.277 45.738,60.242 R25.2@48.036,60.242
TUNE: C25.2 R15.2 U4.20 | length 15.8
  Top Layer w0.2: C25.2@42.25,27.1 42.4,27.25 U4.20@44.475,27.25 ; v2@43.15,27.056 v2(43.15,27.25) ; v2(51.036,32.642) 51.036,31.842 R15.2@51.186,31.692
  Bottom Layer w0.2: v2(43.15,27.25) 43.686,27.786 43.686,29.636 44.5,30.45 50.65,30.45 51.036,30.836 v2(51.036,32.642)
U15_INA: C61.1 U12.1 | length 2.7
  Top Layer w0.4: C61.1@30.736,58.142 33.456,58.142 U12.1@33.461,58.147
U15_INB: C62.1 U12.2 | length 2.7
  Top Layer w0.4: C62.1@30.836,56.642 31.071,56.877 U12.2@33.461,56.877
U15_OSCB: C63.1 U12.6 | length 2.5
  Top Layer w0.4: U12.6@38.711,55.607 41.201,55.607 C63.1@41.236,55.642
U15_OSCB_FILTERED: C63.2 L10.1 R28.1 | length 4.3
  Top Layer w0.4: C63.2@42.936,55.642 45.036,55.642 L10.1@45.086,55.692 47.186,55.692 R28.1@47.236,55.742
U15_OUTA: C65.1 U12.4 | length 2.1
  Top Layer w0.4: U12.4@33.461,54.337 33.461,52.417 C65.1@33.586,52.292
U15_OUTB: C64.2 U12.5 | length 2.4
  Top Layer w0.4: U12.5@38.711,54.337 39.436,53.612 C64.2@39.436,52.242
UPCONV_EN#: R25.1 U1.45 | length 67.7
  Top Layer w0.2: v1(19.624,19.012) 20.728,19.012 21.286,18.454 U1.45@21.286,17.375 ; v2(41.8,58.942) 49.161,58.942 49.736,59.517 R25.1@49.736,60.242
  Bottom Layer w0.2: v1(19.624,19.012) 13.639,24.998 13.639,26.789 16.913,30.063 16.913,36.995 38.86,58.942 v2(41.8,58.942)
UPCONV_IN: C66.2 U11.10 | length 23
  Top Layer w0.635: C66.2@39.536,50.342 55.158,50.342 57.85,47.65 U11.10@57.85,44.036
URFSW_J1: C36.2 U7.12 | length 1.1
  Top Layer w0.25: U7.12@32.311,34.783 32.336,34.808 32.522,34.808 U7.12@32.547,34.833
  Top Layer w0.6: C36.2@31.486,34.783 U7.12@32.311,34.783
URFSW_J2: C37.2 U7.9 | length 1.1
  Top Layer w0.25: C37.2@31.486,36.828 C37.2@31.53,36.783
  Top Layer w0.6: C37.2@31.53,36.783 U7.9@32.549,36.783
USB_D+: R07.1 U1.33 | length 4.7
  Top Layer w0.22: R07.1@11.75,19.15 12.63,19.15 13.164,19.684 13.164,19.731 13.698,20.266 15.149,20.266 15.214,20.2 U1.33@15.961,20.2
USB_D+_CON: JUSB.3 R05.2 R07.2 U2.6 | length 98.6
  Top Layer w0.22: v1(8.598,21.867) 9.881,21.867 R05.2@9.98,21.966 R05.2@10.03,21.966 ; R07.2@10.05,19.15 10.03,19.13 10.03,17.985 9.633,17.589 9.633,11.558 19.153,2.038 35.788,2.038 37.084,3.334 58.734,3.334 66.8,11.4 66.8,17.441 63,21.241 63,22.137 62.15,22.987 62.15,25.45 62.45,25.75 U2.6@63.725,25.75 63.731,25.756 63.913,25.756 64.541,25.128 JUSB.3@65.618,25.128 ; JUSB.3@65.618,25.218 JUSB.3@65.708,25.128
  Bottom Layer w0.22: v1(8.598,21.867) 8.598,19.44 v1(10.03,18.008)
USB_D-: R06.1 U1.32 | length 4.2
  Top Layer w0.22: R06.1@11.851,20.5 12.051,20.7 U1.32@15.961,20.7
USB_D-_CON: JUSB.2 R06.2 U2.4 | length 92.2
  Top Layer w0.22: R06.2@9.95,20.55 9.05,19.65 9.05,11.416 18.843,1.623 35.973,1.623 37.1,2.75 58.926,2.75 67.36,11.184 67.36,17.61 63.965,21.005 63.965,23.71 U2.4@63.825,23.85 ; U2.4@63.725,23.85 U2.4@63.825,23.85 ; JUSB.2@65.708,24.478 64.453,24.478 U2.4@63.825,23.85
USB_EN: R05.1 U1.31 | length 4.9
  Top Layer w0.22: R05.1@11.4,21.95 13.837,21.95 14.587,21.2 U1.31@15.961,21.2 ; R05.1@11.68,21.966 R05.1@11.73,21.966
X1_OUT: C30.1 X2.3 | length 1.8
  Top Layer w0.25: X2.3@42.32,15.041 42.436,15.157 C30.1@42.436,16.75
pads on no net: C07.0 C08.0 H1.0 H3.0 H4.0 U1.2 U1.3 U1.4 U1.10 U1.19 U1.30 U2.1 U2.3 U2.7 U4.14 U4.15 U4.25 U11.3 U11.6 U12.7 X2.1

## Polygon pours and split planes (outlines as drawn)
GND on Bottom Layer "GND_BOTTOM" (solid, pour order 34): 65.15,70 67.36,70 cw(c67.36,67.46) 69.9,67.46 69.9,2.54 cw(c67.36,2.54) 67.36,0 5,0 cw(c5,5) 0,5 0,65 cw(c5,65) 5,70
GND on Top Layer "GND_TOP" (solid, remove dead copper, pour order 33): 65.15,70 67.36,70 cw(c67.36,67.46) 69.9,67.46 69.9,2.54 cw(c67.36,2.54) 67.36,0 5,0 cw(c5,5) 0,5 0,65 cw(c5,65) 5,70
GND on InternalPlane1 (split plane): 5,69.49 65.15,69.49 67.36,69.49 67.376,69.491 67.559,69.482 67.756,69.453 67.95,69.404 68.138,69.337 68.318,69.252 68.489,69.149 68.649,69.031 68.797,68.897 68.931,68.749 69.049,68.589 69.152,68.418 69.237,68.238 69.304,68.05 69.353,67.856 69.382,67.659 69.391,67.476 69.39,67.46 69.39,2.54 69.391,2.524 69.382,2.341 69.353,2.144 69.304,1.95 69.237,1.762 69.152,1.582 69.049,1.411 68.931,1.251 68.797,1.103 68.649,0.969 68.489,0.851 68.318,0.748 68.138,0.663 67.95,0.596 67.756,0.547 67.559,0.518 67.376,0.509 67.36,0.51 5,0.51 4.982,0.509 4.706,0.518 4.414,0.547 4.124,0.594 3.837,0.661 3.556,0.747 3.281,0.85 3.013,0.971 2.754,1.11 2.504,1.265 2.266,1.436 2.038,1.623 1.824,1.824 1.623,2.038 1.436,2.266 1.265,2.504 1.11,2.754 0.971,3.013 0.85,3.281 0.747,3.556 0.661,3.837 0.594,4.124 0.547,4.414 0.518,4.706 0.509,4.982 0.51,5 0.51,65 0.509,65.018 0.518,65.294 0.547,65.586 0.594,65.876 0.661,66.163 0.747,66.444 0.85,66.719 0.971,66.987 1.11,67.246 1.265,67.496 1.436,67.734 1.623,67.962 1.824,68.176 2.038,68.377 2.266,68.564 2.504,68.735 2.754,68.89 3.013,69.029 3.281,69.15 3.556,69.253 3.837,69.339 4.124,69.406 4.414,69.453 4.706,69.482 4.982,69.491
3V3 on InternalPlane2 (split plane): 5,69.49 65.15,69.49 67.36,69.49 67.376,69.491 67.559,69.482 67.756,69.453 67.95,69.404 68.138,69.337 68.318,69.252 68.489,69.149 68.649,69.031 68.797,68.897 68.931,68.749 69.049,68.589 69.152,68.418 69.237,68.238 69.304,68.05 69.353,67.856 69.382,67.659 69.391,67.476 69.39,67.46 69.39,2.54 69.391,2.524 69.382,2.341 69.353,2.144 69.304,1.95 69.237,1.762 69.152,1.582 69.049,1.411 68.931,1.251 68.797,1.103 68.649,0.969 68.489,0.851 68.318,0.748 68.138,0.663 67.95,0.596 67.756,0.547 67.559,0.518 67.376,0.509 67.36,0.51 5,0.51 4.982,0.509 4.706,0.518 4.414,0.547 4.124,0.594 3.837,0.661 3.556,0.747 3.281,0.85 3.013,0.971 2.754,1.11 2.504,1.265 2.266,1.436 2.038,1.623 1.824,1.824 1.623,2.038 1.436,2.266 1.265,2.504 1.11,2.754 0.971,3.013 0.85,3.281 0.747,3.556 0.661,3.837 0.594,4.124 0.547,4.414 0.518,4.706 0.509,4.982 0.51,5 0.51,65 0.509,65.018 0.518,65.294 0.547,65.586 0.594,65.876 0.661,66.163 0.747,66.444 0.85,66.719 0.971,66.987 1.11,67.246 1.265,67.496 1.436,67.734 1.623,67.962 1.824,68.176 2.038,68.377 2.266,68.564 2.504,68.735 2.754,68.89 3.013,69.029 3.281,69.15 3.556,69.253 3.837,69.339 4.124,69.406 4.414,69.453 4.706,69.482 4.982,69.491

## Other copper
Top Layer:
  rectangle net GND: 31.777,35.558 33.454,36.158
  rectangle net GND: 49.055,38.002 49.955,40.225
  rectangle net GND: 18.95,32.053 19.85,34.275
  rectangle net 3V3: 41,8.9 48.4,12.75
  rectangle net 3V3: 40.05,12.15 42.8,13.9
  rectangle net 3V3: 40.05,9.85 44.386,12.75
  rectangle net 5V: 50.727,35.2 58.65,36.8
  rectangle net 5V: 23.375,39.602 30.7,41.352
  rectangle net GND: 29.123,25.143 29.8,26.2
  rectangle net 3V3RF_L01CPU: 60.106,11.9 63.9,14.338
  rectangle net GND: 11.4,45.3 12.585,46.35
  pour cut-out: 35.815,37.567 36.154,37.567 36.154,37.187 35.89,37.187 35.815,37.262
  pour cut-out: 49.325,29.136 49.438,29.023 50.362,29.023 50.362,22.999 50.28,23.08 43.736,23.08 43.736,28.992 43.686,29.042
  pour cut-out: 40.295,40.1 42.107,40.1 42.107,34.865 40.353,34.865
  pour cut-out: 28.09,26.966 28.717,26.966 28.717,26.153 29.15,25.72 29.146,25.716 29.146,24.196 28.296,24.196 28.25,24.15 28.1,24.3 28.1,26.965

## Silkscreen, mask and mechanical layers (free items; w line width, h text height)
Top Overlay:
  text "Electrosense Wideband Converter v2.0" at 13.65,66.95 h3
  text "Franco Minucci" at 10,65.018 h2.5
  text "Bertold Van den Bergh" at 26.55,65.018 h2.5
  text "Sofie Pollin" at 51.1,64.9 h2.5
  text "*GND" at 1.75,8.05 h1.52
  text "GND" at 24.074,7.794 h1
Top Paste:
  rectangle: 17.35,35.3 21.425,38.95
  rectangle: 47.455,40.989 51.53,44.639
Top Solder:
  rectangle: 17.35,35.3 21.425,38.95
  rectangle: 47.455,40.989 51.53,44.639

## Text inside footprints (layer, text, board x,y; h text height)
JUSB: Mechanical 13 "PCB Edge" at 72.208,30.128 h0.2 r180